# EAGLE board ParaBeep V0.1 (EAGLE 9.5.2)
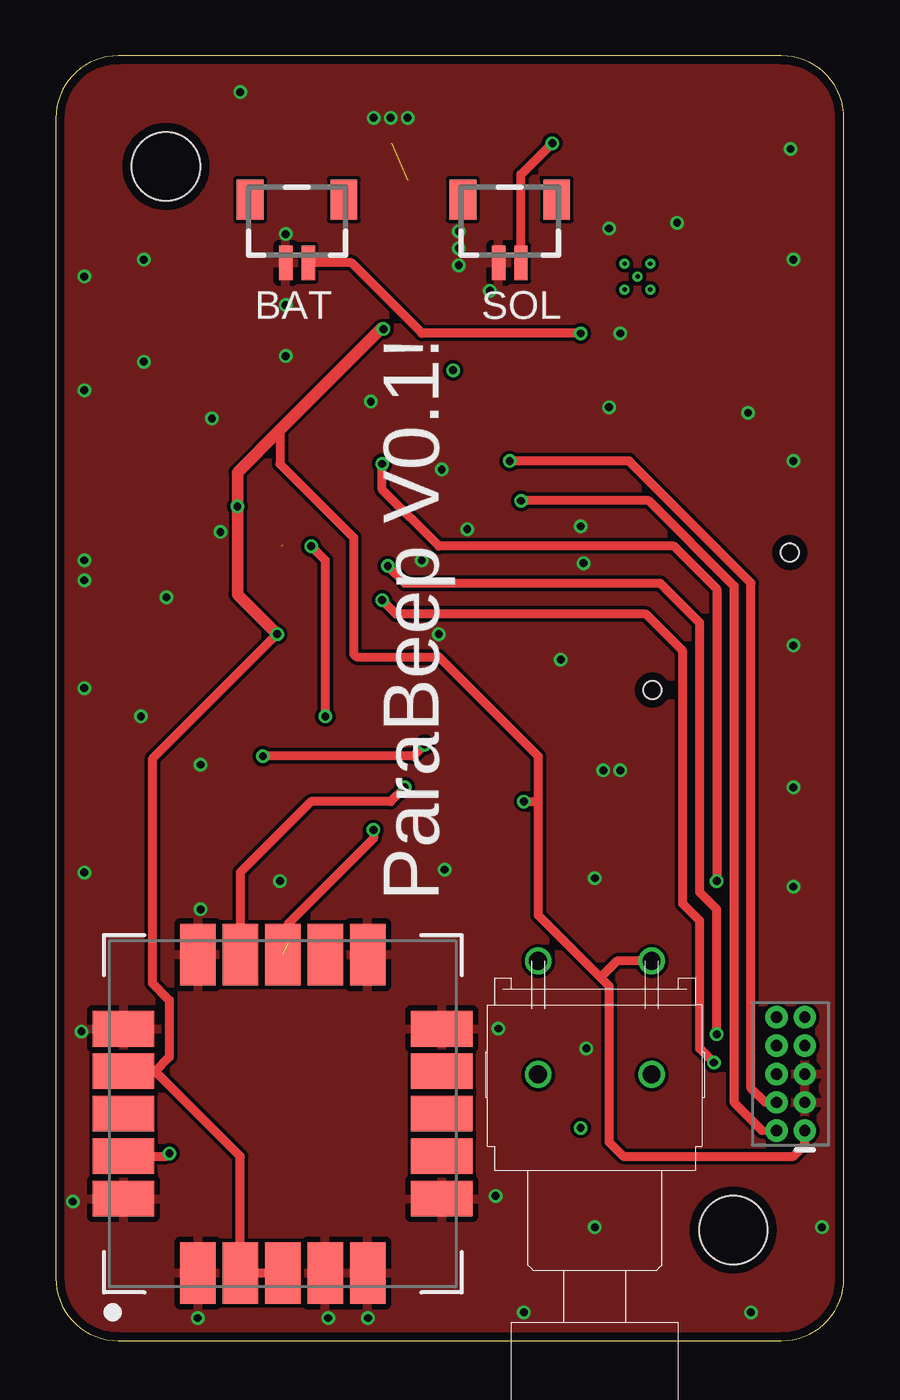
[diagram p0: board, top side]
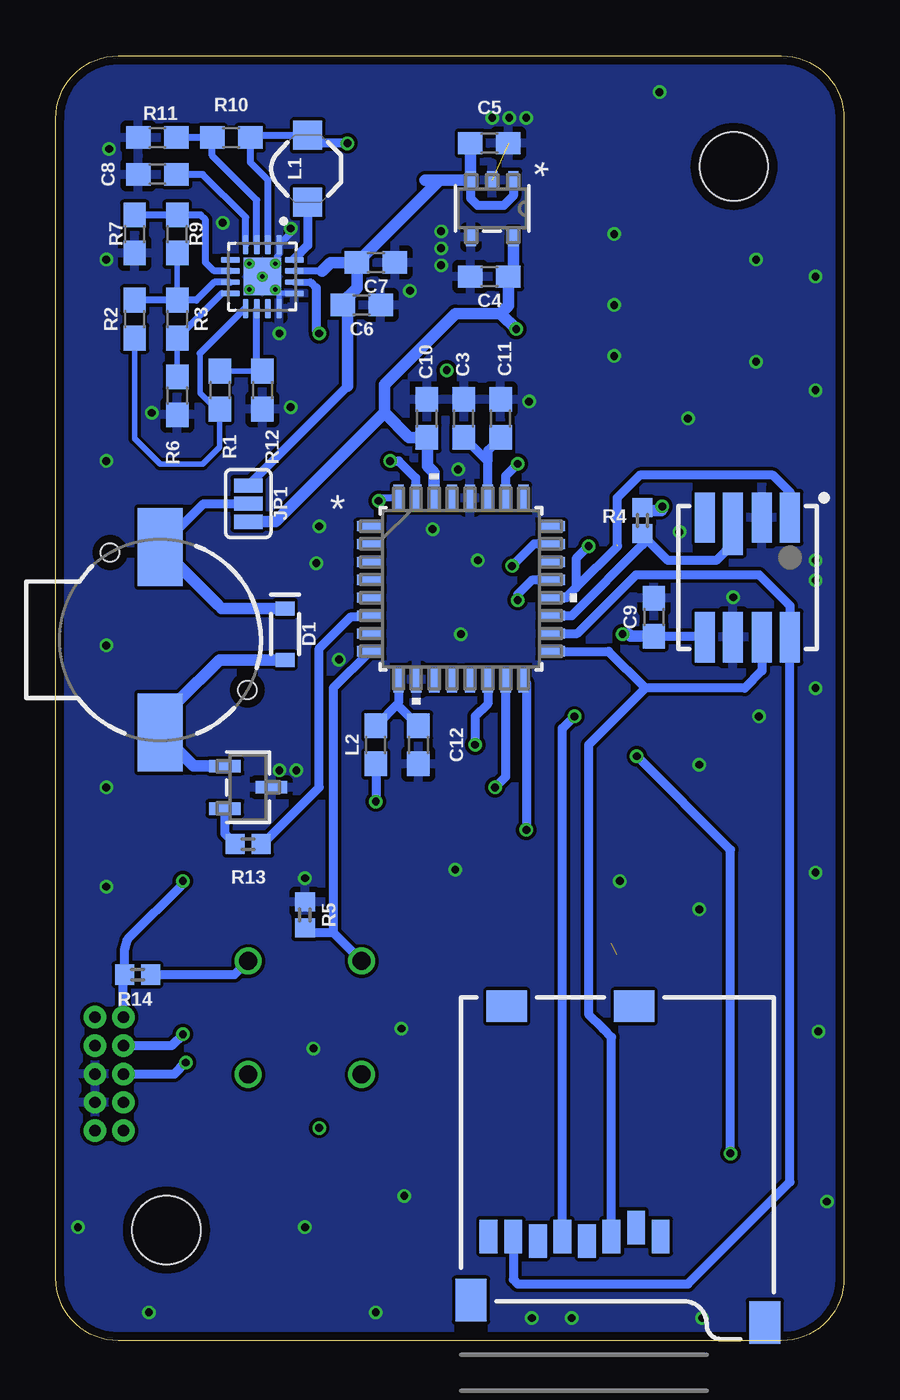
[diagram p1: board, bottom side, seen from below]

Size 35.28 x 57.51 mm. Coordinates in mm from the lower left corner, seen from the top.
Outline: 0,54.71 0,2.79 arc90 2.79,0 32.49,0 arc90 35.28,2.79 35.28,54.71 arc90 32.49,57.51 2.79,57.51 arc90 0,54.71
Copper layers (1*16): Top 0.035559375mm / dielectric 1.6mm / Bottom 0.035559375mm
Design rules "oshpark-2layer *": minimum track width 6mil, minimum drill 10mil, track to track 6mil, track to pad 6mil, pad to pad 6mil, via to via 6mil, smd to smd 6mil, copper to edge 15mil, drill to drill 6mil, minimum pad ring 5mil, minimum via ring 5mil, stop-mask expansion 2.5mil, vias tented up to drill 30mil, thermal gap 10mil

## Footprints (pad centres in the part's own frame; a part is rotated, then mirrored left to right if it is on the bottom)
SM02B-SSR-H-TB = smd 0.6 x 1.55: 1 -0.5,1.925; 2 0.5,1.925 | smd 1.2 x 1.8: FIT@1 -2.1,-0.9; FIT@2 2.1,-0.9
0603 = smd 1.1 x 1: 1 -0.85,0; 2 0.85,0
SOD-323 = smd 0.63 x 0.83: A 1.15,0; C -1.15,0
STAND-OFF-TIGHT = hole 3.048: 0,0
MICRO-SD-SOCKET = smd 1.8 x 1.4: CD1 -2.05,0.4; CD2 -7.75,0.4 | smd 0.8 x 1.5: CS -7.84,10.3; DI -6.74,10.7; DO -2.34,10.7; GND -3.44,10.9; RSV1 -8.94,10.7; RSV2 -1.24,10.7; SCLK -4.54,10.7; VCC -5.64,10.9 | smd 1.4 x 1.9: GND1 -13.6,14.55; GND3 -0.45,13.55
SMT-JUMPER_3_NO_SILK = smd 0.635 x 1.27: 1 -0.813,0; 2 0,0; 3 0.813,0
2X5-PTH-1.27MM = drill 0.508 pad 1: 1 -2.54,-0.635; 2 -2.54,0.635; 3 -1.27,-0.635; 4 -1.27,0.635; 5 0,-0.635; 6 0,0.635; 7 1.27,-0.635; 8 1.27,0.635; 9 2.54,-0.635; 10 2.54,0.635
INDUCTOR_4.7UH = smd 1.3 x 1.3: P$1 -1.5,0; P$2 1.5,0
0402 = smd 0.85 x 0.9: 1 -0.58,0; 2 0.58,0
TRANS_2SB852K_ROM = smd 0.559 x 1.422: 1 -0.95,-1.041; 2 0.95,-1.041; 3 0,1.041
BUZZER-CCV-KIT = smd 3.5 x 2: + 4.15,0; - -4.15,0 | hole 0.8: -3.9,-2.25; 2.25,3.9
QFN50P300X300X100-17N = smd 0.86 x 0.26: 1 -1.435,0.75; 2 -1.435,0.25; 3 -1.435,-0.25; 4 -1.435,-0.75; 9 1.435,-0.75; 10 1.435,-0.25; 11 1.435,0.25; 12 1.435,0.75 | smd 0.26 x 0.86: 5 -0.75,-1.435; 6 -0.25,-1.435; 7 0.25,-1.435; 8 0.75,-1.435; 13 0.75,1.435; 14 0.25,1.435; 15 -0.25,1.435; 16 -0.75,1.435 | smd 1.68 x 1.68: 17 0,0 | drill 0.2 pad 0.4: 18 0,0; 19 -0.58,0.58; 20 0.58,0.58; 21 -0.58,-0.58; 22 0.58,-0.58
DDC5_TEX-L = smd 0.8 x 0.457: 1 -1.276,0.95; 2 -1.276,0; 3 -1.276,-0.95; 4 1.276,-0.95; 5 1.276,0.95
SAM-M8Q = smd 2.75 x 1.6: 1 -7.125,3.8; 2 -7.125,1.9; 3 -7.125,0; 4 -7.125,-1.9; 5 -7.125,-3.8; 11 7.125,-3.8; 12 7.125,-1.9; 13 7.125,0; 14 7.125,1.9; 15 7.125,3.8 | smd 1.6 x 2.75: 6 -3.8,-7.125; 7 -1.9,-7.125; 8 0,-7.125; 9 1.9,-7.125; 10 3.8,-7.125; 16 3.8,7.125; 17 1.9,7.125; 18 0,7.125; 19 -1.9,7.125; 20 -3.8,7.125
MS5803 = smd 2.25 x 0.9: 1 -2.675,1.9; 2 -2.675,0.65; 4 -2.675,-1.9; 5 2.675,-1.9; 6 2.675,-0.65; 7 2.675,0.65; 8 2.675,1.9 | smd 2.8 x 0.9: 3 -2.4,-0.65
TQFP32_MC_MCH-L = smd 1.168 x 0.457: 1 -4.068,2.8; 2 -4.068,2; 3 -4.068,1.2; 4 -4.068,0.4; 5 -4.068,-0.4; 6 -4.068,-1.2; 7 -4.068,-2; 8 -4.068,-2.8; 17 4.068,-2.8; 18 4.068,-2; 19 4.068,-1.2; 20 4.068,-0.4; 21 4.068,0.4; 22 4.068,1.2; 23 4.068,2; 24 4.068,2.8 | smd 0.457 x 1.168: 9 -2.8,-4.068; 10 -2,-4.068; 11 -1.2,-4.068; 12 -0.4,-4.068; 13 0.4,-4.068; 14 1.2,-4.068; 15 2,-4.068; 16 2.8,-4.068; 25 2.8,4.068; 26 2,4.068; 27 1.2,4.068; 28 0.4,4.068; 29 -0.4,4.068; 30 -1.2,4.068; 31 -2,4.068; 32 -2.8,4.068
AB11AH-HC = drill 0.8: P$1 -2.54,9.373; P$2 2.54,9.373; P$3 -2.54,4.293; P$4 2.54,4.293

## Placement (x,y rotation side)
BAT  SM02B-SSR-H-TB  [SM02B-SSR-H-TB]  10.79,50.16 180 top
C3  1.0uF  [0603]  17.02,41.27 90 bottom
C4  1.0uF  [0603]  15.88,47.62 180 bottom
C5  1.0uF  [0603]  15.88,53.59 0 bottom
C6  4.7uF  [0603]  21.59,46.35 180 bottom
C7  0.1uF  [0603]  20.95,48.26 180 bottom
C8  10nF  [0603]  30.73,52.2 0 bottom
C9  0.1uF  [0603]  8.51,32.38 90 bottom
C10  0.1uF  [0603]  18.67,41.27 90 bottom
C11  0.1uF  [0603]  15.37,41.27 90 bottom
C12  0.1uF  [0603]  19.05,26.67 270 bottom
D1  250mA/100V  [SOD-323]  25.02,31.62 270 bottom
H1  STAND-OFFTIGHT  [STAND-OFF-TIGHT]  4.93,52.55 0 top
H2  STAND-OFFTIGHT  [STAND-OFF-TIGHT]  30.33,4.95 0 top
J1  MICRO-SD_CARD_SOCKETPUSH-PUSH  [MICRO-SD-SOCKET]  17.14,15.37 180 bottom
JP1  JUMPER-SMT_3_NO_SILK  [SMT-JUMPER_3_NO_SILK]  26.67,37.47 270 bottom
JP3  CORTEX_DEBUG_PTH  [2X5-PTH-1.27MM]  32.89,11.94 90 top
L1  4.7µH/±30%/1.2A  [INDUCTOR_4.7UH]  24,52.45 270 bottom
L2  [0603]  20.95,26.67 90 bottom
R1  6.19M  [0603]  27.94,42.55 270 bottom
R2  542K  [0603]  31.75,45.72 90 bottom
R3  6.19M  [0603]  29.84,45.72 270 bottom
R4  [0402]  9.02,36.7 90 bottom
R5  [0402]  24.13,19.05 270 bottom
R6  3.83M  [0603]  29.84,42.29 270 bottom
R7  4.42M  [0603]  31.75,49.53 270 bottom
R8  2SC2412KT146R  [TRANS_2SB852K_ROM]  26.67,24.77 270 bottom
R9  5.65M  [0603]  29.84,49.53 90 bottom
R10  4.42M  [0603]  27.43,53.85 180 bottom
R11  15M  [0603]  30.73,53.85 180 bottom
R12  3.32M  [0603]  26.04,42.55 270 bottom
R13  [0402]  26.67,22.23 0 bottom
R14  [0402]  31.62,16.38 0 bottom
SG1  BUZZER-SMD_KIT  [BUZZER-CCV-KIT]  30.61,31.37 270 bottom
SOL  SM02B-SSR-H-TB  [SM02B-SSR-H-TB]  20.32,50.16 180 top
U1  BQ25504RGTR  [QFN50P300X300X100-17N]  26.04,47.62 270 bottom
U3  TPS78330DDCRDDC5_TEX-L  [DDC5_TEX-L]  15.75,50.67 270 bottom
U4  UBLOX_SAM_M8Q-0-10  [SAM-M8Q]  10.16,10.16 90 top
U5  MS5803-14BA  [MS5803]  4.32,34.16 270 bottom
U6  ATSAML10E16A-AFTTQFP32_MC_MCH-L  [TQFP32_MC_MCH-L]  17.14,33.66 0 bottom
U$3  AB11AH-HC  [AB11AH-HC]  24.13,7.62 0 top

## Library data of the parts
BAT SOL = con-jst2
C3-C5 = SparkFun-Capacitors; PROD_ID: CAP-00868
C6 = SparkFun-Capacitors; PROD_ID: CAP-08280
C7 = SparkFun-Capacitors; PROD_ID: CAP-08604
C8 = SparkFun-Capacitors; PROD_ID: CAP-00867
C9-C12 = SparkFun-Capacitors; PROD_ID: CAP-00810
D1 = SparkFun-DiscreteSemi; PROD_ID: DIO-09646
H1 H2 = SparkFun-Hardware
J1 = SparkFun-Connectors; PROD_ID: CONN-07820
JP1 = SparkFun-Jumpers
JP3 = SparkFun-Connectors
L1 = SparkFun-Coils; PROD_ID: NDUC-10146
L2 = SparkFun-Coils; PROD_ID: NDUC-07859
R1-R7 R9-R14 = SparkFun-Resistors
R8 = 2SC2412KT146R; BUILT_BY: EMA_Matt; COPYRIGHT: Copyright (C) 2018 Accelerated Designs. All rights reserved; MANUFACTURER_PART_NUMBER: 2SC2412KT146R; SOURCELIBRARY: Rohm_2019-09-23; VENDOR: ROHM Semiconductor
SG1 = SparkFun-Electromechanical; PROD_ID: COMP-08568
U1 = BQ25504RGTR; DESCRIPTION: Ultra Low Power Boost Converter with Battery Management for Energy Harvester | Nano-Power Management 16-VQFN -40 to 85; DIGI-KEY_PART_NUMBER: 296-48495-1-ND; MF: Texas Instruments; MP: BQ25504RGTR; PACKAGE: VQFN-16 Texas Instruments; PURCHASE-URL: https://pricing.snapeda.com/search/part/BQ25504RGTR/?ref=eda
U3 = TPS78330DDCR; BUILT_BY: EMA_UL_Team; MANUFACTURER: Texas Instruments; MANUFACTURER_PART_NUMBER: TPS78330DDCR; SOURCELIBRARY: TI_2014-06-19; VENDOR: Texas Instruments
U4 = SparkFun-GPS; PROD_ID: IC-14070
U5 = SparkFun-Sensors; PROD_ID: IC-12111
U6 = ATSAML10E16A-AFT; BUILT_BY: EMA_Molly; COPYRIGHT: Copyright (C) 2018 Accelerated Designs. All rights reserved; MANUFACTURER_PART_NUMBER: ATSAML10E16A-AFT; SOURCELIBRARY: Microchip_2019-08-23_25; VENDOR: Microchip
U$3 = AB11AH-HC

## Nets
!RESET: JP3.10 R14.1 U6.26
BUTTON: R5.2 U6.8 U$3.P$1
BUZZER: R13.2 U6.6
CS_BARO: R4.1 U5.3 U6.19
GND: BAT.2 C3.2 C4.2 C5.2 C6.1 C7.1 C8.1 C9.2 C10.2 C11.2 C12.2 JP3.3 JP3.5 R5.1 R6.2 R7.2 R8.3 R11.2 R12.2 SOL.2 U1.1 U1.12 U1.13 U1.17 U3.2 U3.4 U4.1 U4.4 U4.5 U4.6 U4.10 U4.11 U4.15 U4.16 U4.20 U5.2 U5.6 U6.10 U6.28
GPS_INT: U4.19 U6.14
N$1: C3.1 C11.1 U6.27
N$2: D1.C JP1.2 SG1.-
N$3: R2.2 R3.1 R9.1 U1.7
N$5: R3.2 R6.1 U1.8
N$6: R7.1 R9.2 U1.6
N$7: R1.2 R2.1 U1.9
N$8: R1.1 R12.1 U1.10
N$9: C8.2 U1.4
N$10: D1.A R8.1 SG1.+
N$11: R10.2 R11.1 U1.3
N$12: L1.P$1 R10.1 SOL.1 U1.2
N$13: R8.2 R13.1
N$14: U6.12
N$15: L1.P$2 U1.16
N$17: BAT.1 U1.14
N$18: C12.1 L2.2 U6.9
RX: JP3.6 U6.21
SC_MEM: J1.CS
SPI_MISO: J1.DO U5.8 U6.18
SPI_MOSI: J1.DI U5.7 U6.17
SPI_SCK: J1.SCLK U5.1 U6.20
SWCLK: JP3.4 U6.31
SWDIO: JP3.2 U6.32
TX: JP3.8 U6.23
USART_RX: U4.13 U6.16
USART_TX: U4.14 U6.15
VCC_1: C4.1 C9.1 C10.1 JP1.3 JP3.1 L2.1 R4.2 R14.2 U3.5 U4.2 U4.3 U4.17 U5.5 U6.30 U$3.P$2
VIN: C5.1 C6.2 C7.2 JP1.1 U1.15 U3.1 U3.3

## Tracks (layer width: path | path; a pad name or v marks a point on that pad's centre or on a via)
!RESET  (via drill 0.35)
  Top 0.406: v29.59,20.57 29.59,33.64 27.67,35.56 17.14,35.56 14.61,38.1 v14.61,39.24
  Bottom 0.305: 32.26,16.31 32.26,16.33 R14.1
  Bottom 0.406: JP3.10 32.26,16.31 | R14.1 32.2,17.49 32.06,17.98 29.59,20.45 v29.59,20.57 | v14.61,39.24 15.14,38.7 U6.26
BUTTON
  Bottom 0.305: R5.2 23.92,18.26
  Bottom 0.406: U6.8 22.86,29.21 22.86,18.26 | 22.86,18.26 U$3.P$1 | 23.92,18.26 22.86,18.26
BUZZER
  Bottom 0.305: U6.6 21.28,32.38 | R13.2 26.04,22.23
  Bottom 0.406: 21.28,32.38 22.1,32.38 23.5,30.99 23.5,24.77 26.04,22.23
CS_BARO
  Bottom 0.254: 4.97,35.67 U5.3
  Bottom 0.305: 9.02,35.63 R4.1 9.02,36.07
  Bottom 0.406: 4.97,35.67 5.71,34.92 7.87,34.92 9.02,36.07 | U6.19 12.19,32.45 9.02,35.63
GND  (via drill 0.35)  (1 unrouted)
  Bottom 0.254: U1.17 25.4,48.26 25.4,48.51 25.27,48.64 25.27,49.05 U1.1 | U1.17 25.29,46.88 | 25.29,46.88 U1.13 | U1.17 25.29,46.88 | 25.29,46.88 U1.12
  Bottom 0.305: U1.1 24.77,49.58 v24.77,49.78
  other vias: 6.48,19.3 6.48,25.78 10.03,20.57 17.4,21.08 19.81,13.97 23.75,13.08 19.68,6.48 24.13,20.7 24.51,25.53 25.27,25.53 24.13,5.08 13.97,1.02 12.19,1.02 0.76,6.22 6.35,1.02 1.14,13.84 4.95,33.27 1.27,34.04 1.27,34.92 17.14,31.62 16.38,34.92 18.41,36.32 17.27,38.99 24.77,41.78 30.99,41.53 10.29,44.07 3.94,43.81 3.94,48.39 10.29,49.53 14.1,42.04 14.22,54.74 14.99,54.74 15.75,54.74 18.03,49.66 18.03,48.9 18.03,48.13 19.43,46.99 33.02,48.39 32.89,53.34 27.81,50.04 25.27,45.09 10.29,46.35 34.29,5.08 31.11,1.27 20.95,1.27 1.27,20.95 3.81,27.94 1.27,29.21 1.27,42.55 6.99,41.27 1.27,47.62 8.26,55.88 33.02,39.37 33.02,31.11 33.02,24.77 33.02,20.32 23.5,36.45 23.62,34.8 7.37,36.2 22.61,30.48
  pour Bottom: -5.08,-4.45 -5.08,60.33 38.1,60.33 38.1,-5.08 -4.45,-5.08
  pour Top: -5.08,-5.71 -5.08,60.96 -4.45,61.59 36.83,61.59 38.1,60.33 38.1,-5.08 37.47,-5.71
GPS_INT  (via drill 0.35)
  Top 0.406: U4.19 4.95,8.26 v5.08,8.38 | v16.51,26.67 16,26.16 v9.27,26.16
  Bottom 0.406: U6.14 15.95,28.5 16.51,27.94 v16.51,26.67 | v5.08,8.38 5.08,21.97 v9.27,26.16
N$1
  Bottom 0.406: U6.27 15.95,39.35 | 15.95,39.35 C3.1 | C11.1 15.95,39.85 15.95,39.35
N$2
  Bottom 0.305: 27.86,32.77 28.02,32.94 | 30.25,35.16 SG1.-
  Bottom 0.406: SG1.- 28.66,37.47 JP1.2
  Bottom 0.508: D1.C 27.86,32.77 | 28.02,32.94 30.25,35.16
N$3
  Bottom 0.254: R3.1 R9.1
  Bottom 0.305: U1.7 28.19,47.38 29,46.57 R3.1 R2.2
N$5
  Bottom 0.254: R3.2 R6.1 | 27.84,46.88 U1.8
  Bottom 0.305: R3.2 27.84,46.88
N$6
  Bottom 0.305: U1.6 28.19,47.88 28.57,48.26 28.57,50.16 28.79,50.38 R9.2 R7.1
N$7
  Bottom 0.254: R1.2 27.94,41.53 | 27.94,41.53 27.94,40.01 28.7,39.24 30.61,39.24 31.75,40.39 R2.1 | U1.9 26.84,46.19 | 28.83,44.2 28.83,42.42 27.94,41.53
  Bottom 0.305: 28.83,44.2 26.84,46.19
N$8
  Bottom 0.254: R1.1 R12.1 26.29,43.65
  Bottom 0.305: 26.29,43.65 U1.10
N$9
  Bottom 0.305: U1.4 26.79,50.28 28.7,52.2 C8.2
N$10
  Bottom 0.305: 30.48,27.94 29.84,28.57 | 30.59,27.2 30.27,26.88
  Bottom 0.406: 30.59,27.2 SG1.+ 30.48,27.35 30.48,27.94
  Bottom 0.508: D1.A 27.95,30.47 29.84,28.57 | 30.27,26.88 29.1,25.71 R8.1
N$11
  Bottom 0.305: U1.3 26.29,51.05 28.28,53.05 R10.2 R11.1
N$12  (via drill 0.35)
  Top 0.406: SOL.1 20.82,52.19 v22.23,53.59
  Bottom 0.305: U1.2 25.79,51.95 26.58,52.74 R10.1 26.48,53.95 L1.P$1
  Bottom 0.406: v22.23,53.59 23.65,53.59 L1.P$1
N$13
  Bottom 0.406: R13.1 27.71,22.69 R8.2
N$15
  Bottom 0.254: 24.6,48.42 U1.16
  Bottom 0.406: L1.P$2 24,49.02 24.6,48.42
N$17  (via drill 0.35)
  Top 0.406: v23.5,45.09 16.38,45.09 13.23,48.24 BAT.1
  Bottom 0.305: U1.14 23.88,47.38
  Bottom 0.356: 23.88,47.38 23.62,47.12
  Bottom 0.406: 23.62,47.12 23.62,45.21 v23.5,45.09
N$18
  Bottom 0.305: U6.9 19.95,28.41
  Bottom 0.406: 19.95,28.41 C12.1 | U6.9 19.95,28.53 L2.2
N$19  (via drill 0.35)
  other vias: 23.5,9.53
N$23  (via drill 0.35)
  other vias: 17.78,43.43
RX  (via drill 0.35)
  Top 0.406: v29.46,12.45 28.83,13.08 28.83,18.8 28.07,19.56 28.07,30.86 26.42,32.51 15.24,32.51 v14.61,33.15
  Bottom 0.305: U6.21 13.1,34.04
  Bottom 0.406: JP3.6 29.97,11.94 v29.46,12.45 | 13.1,34.04 13.97,34.04 14.61,33.4 v14.61,33.15
SPI_MISO
  Bottom 0.254: 2.42,31.75 U5.8 | 2.42,30.6 2.42,31.11
  Bottom 0.406: U6.18 11.93,31.66 9.3,34.29 3.81,34.29 2.42,32.9 2.42,31.75 | J1.DO 14.8,2.74 14.61,2.54 6.99,2.54 2.42,7.11 2.42,31.11 | 2.42,31.11 U5.8 2.42,31.11
SPI_MOSI
  Bottom 0.406: U5.7 3.67,29.99 4.45,29.21 8.89,29.21 | U6.17 10.54,30.86 8.89,29.21 | J1.DI 10.4,13.58 10.79,13.97 11.43,14.61 11.43,26.67 8.89,29.21
SPI_SCK  (via drill 0.35)  (1 unrouted)
  Top 0.406: v12.06,27.94 12.06,34.92 v11.43,35.56
  Bottom 0.254: U6.20 12.44,33.26 | 2.42,37.98 U5.1
  Bottom 0.406: 12.44,33.26 11.99,33.71 | 11.99,33.71 10.13,35.57 | 2.42,37.98 3.17,38.73 9.14,38.73 10.16,37.72 10.16,35.6 | J1.SCLK 12.61,27.4 v12.06,27.94 | v11.43,35.56 11.99,35 11.99,33.83 11.99,33.71
SWCLK  (via drill 0.35)
  Top 0.305: JP3.4 31.75,10.67
  Top 0.406: 31.75,10.67 31.11,11.3 31.11,33.91 25.65,39.37 v20.32,39.37
  Bottom 0.305: U6.31 19.18,37.76
  Bottom 0.406: v20.32,39.37 19.94,39.37 19.18,38.61 19.18,37.76
SWDIO  (via drill 0.35)
  Top 0.305: 31.62,9.4 JP3.2
  Top 0.406: v20.83,37.59 26.54,37.59 30.35,33.78 30.35,10.67 31.62,9.4
  Bottom 0.305: U6.32 20.7,37.72 v20.83,37.59
TX  (via drill 0.35)
  Top 0.406: v29.59,13.72 29.59,19.3 28.83,20.07 28.83,32.13 27.05,33.91 15.62,33.91 v14.86,34.67
  Bottom 0.406: v29.59,13.72 30.1,13.21 JP3.8 | U6.23 13.88,35.66 v14.86,34.67
USART_RX  (via drill 0.35)  (1 unrouted)
  Top 0.406: 10.41,17.78 10.41,18.67 14.22,22.47 v14.22,22.86
  Bottom 0.406: U6.16 14.22,29.46 v14.22,22.86
USART_TX  (via drill 0.35)
  Top 0.406: U4.14 8.26,20.96 11.43,24.13 14.99,24.13 v15.62,24.77
  Bottom 0.406: U6.15 15.14,25.24 v15.62,24.77
VCC_1  (via drill 0.35)
  Top 0.406: 10.03,40.77 10.03,39.24 13.34,35.94 13.34,30.73 13.46,30.61 17.14,30.61 21.59,26.16 21.59,24.13 | JP3.1 33.53,8.76 33.02,8.26 25.4,8.26 24.77,8.89 24.77,15.88 24.38,16.26 | 21.59,24.13 21.59,19.05 24.38,16.26 | v20.95,24.13 21.59,24.13 | v9.91,31.62 4.32,26.04 4.32,16 5.08,15.24 5.08,12.7 4.44,12.06 | U4.3 U4.2 8.26,8.24 4.44,12.06 | U$3.P$2 25.12,16.99 24.38,16.26 | 4.44,12.06 U4.17
  Top 0.508: v14.67,45.28 14.61,45.34 10.03,40.77 8.13,38.86 v8.13,37.34 8.13,33.4 v9.91,31.62
  Bottom 0.305: 6.26,31.54 U5.5
  Bottom 0.406: C9.1 6.26,31.54 | L2.1 v20.95,24.13 | R14.2 27.28,16.38 U$3.P$2
  Bottom 0.508: U6.30 18.34,38.86 18.63,39.15 18.63,40.39 C10.1 19.47,40.42 20.57,41.53 | 20.57,41.53 20.57,42.8 17.4,45.97 15.37,45.97 | 15.37,45.97 15.03,46.32 C4.1 14.8,47.85 U3.5 | JP1.3 25.45,36.65 20.57,41.53 | R4.2 8.89,37.16 8.18,37.16 8.13,37.21 v8.13,37.34 | v14.67,45.28 15.37,45.97 | C9.1 9.56,31.54 9.65,31.62 v9.91,31.62
VIN
  Bottom 0.305: 23.37,47.88 U1.15 | 22.44,46.48 C6.2 | 18.75,51.95 18.12,51.95 16.89,51.95 U3.3 16.7,53.57 C5.1
  Bottom 0.406: 22.23,42.72 JP1.1 | U3.1 14.8,51.24 15.24,50.8 16.38,50.8 16.7,51.12 U3.3
  Bottom 0.508: C5.1 16.73,52.12 16.89,51.95 | U3.3 18.75,51.95 | 18.12,51.95 C7.2 | C7.2 22.98,48.26 23.37,47.88 | C7.2 21.8,47.12 22.44,46.48 | C6.2 22.23,46.14 22.23,42.72

## Text on the board
tNames: ParaBeep V0.1!